# Altium PCB Webbie-V3.3.PcbDoc (part 2 of 3)
Units mil, origin at the board's own origin, x right, y up, seen from the top; angles counter-clockwise.
Board outline 3937.01 x 1574.8 mil, 4 copper layers (Top Layer, GND, GND-POWER, Bottom Layer), stack 61.865 mil thick; 129 components, 99 nets, 520 pads, 260 vias.
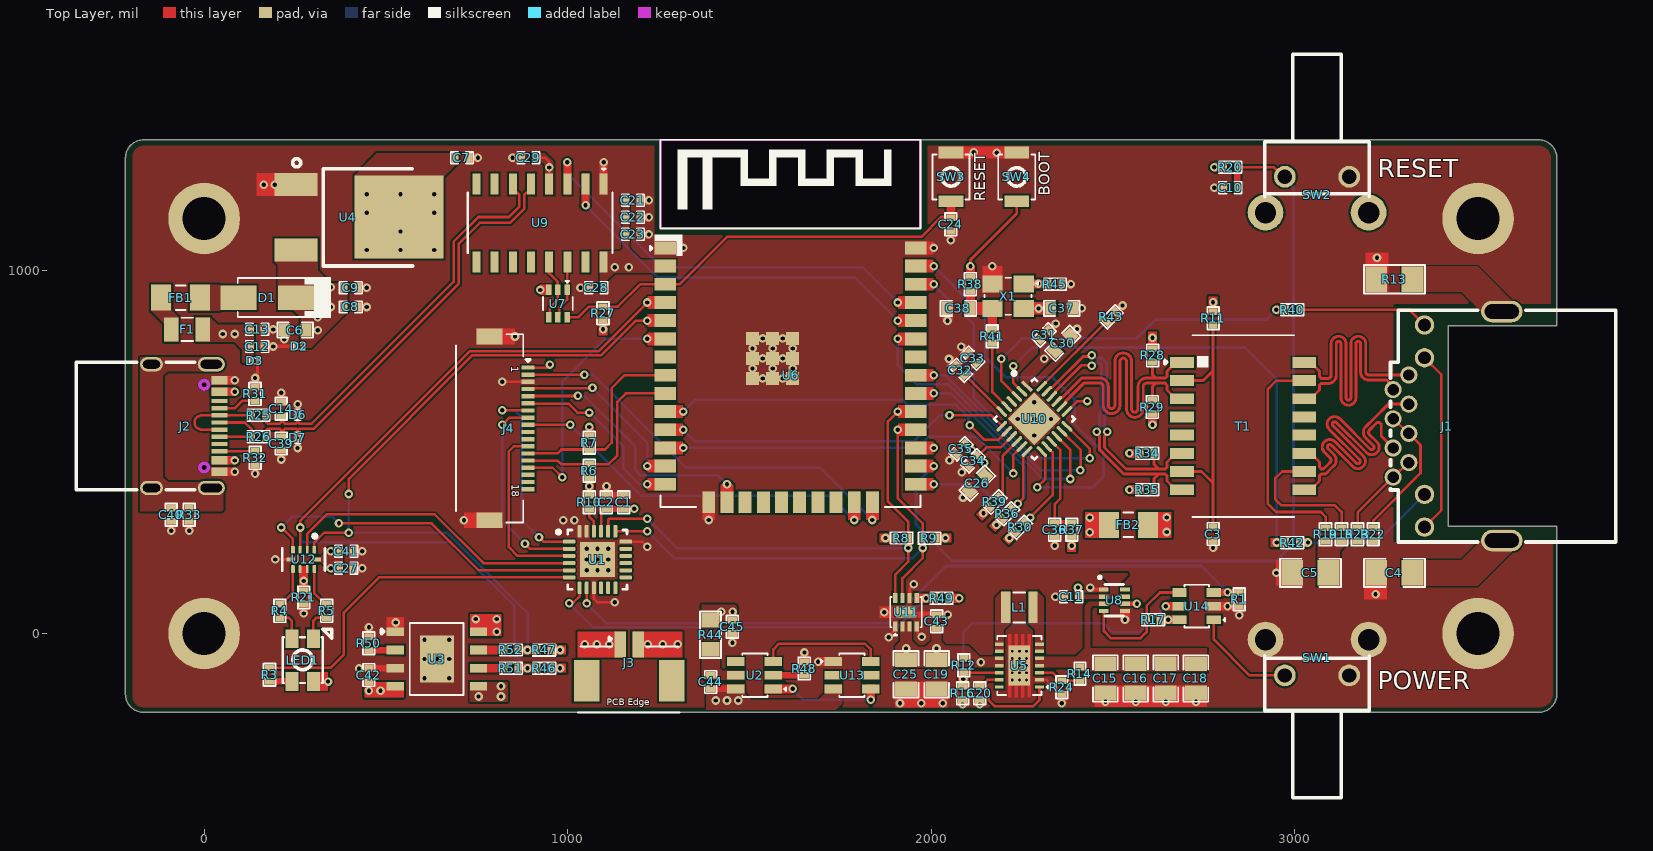
[diagram p0: Top Layer view]

## Part data (continued)
L1: library part DFE252012P-1R0M=P2, "FIXED IND 1UH 3.2A 0.042OHM SMD", Case Code (Imperial)=1008, Case Code (Metric)=2520, Current Rating=4.3A, DC Resistance (DCR)=42mR, Inductance Tolerance=20%, LCSC Part Number=C882955, Manufacturer=Murata, Manufacturer Part Number=DFE252012P-1R0M=P2, Max DC Current=3.2A, Max Operating Temperature=125°C, Min Operating Temperature=-40°C, Test Frequency=1MHz, Case/Package=1008, ComponentLink1Description=http://www.farnell.com/datasheets/2550134.pdf?src-supplier=Farnell, ComponentLink1URL=http://www.farnell.com/datasheets/2550134.pdf?src-supplier=Farnell, ComponentLink2Description=https://www.murata.com/~/media/webrenewal/products/inductor/chip/tokoproducts/wirewoundmetalalloychiptype/m_dfe252012p.ashx?src-supplier=Digikey, ComponentLink2URL=https://www.murata.com/~/media/webrenewal/products/inductor/chip/tokoproducts/wirewoundmetalalloychiptype/m_dfe252012p.ashx?src-supplier=Digikey, ComponentLink3Description=http://www.murata.com/~/media/webrenewal/products/inductor/chip/tokoproducts/wirewoundmetalalloychiptype/m_dfe252012p.ashx?src-supplier=Digikey, ComponentLink3URL=http://www.murata.com/~/media/webrenewal/products/inductor/chip/tokoproducts/wirewoundmetalalloychiptype/m_dfe252012p.ashx?src-supplier=Digikey, ComponentLink4Description=http://www.toko.co.jp/products/pdf/inductors/dfe252012p.pdf?src-supplier=Avnet, ComponentLink4URL=http://www.toko.co.jp/products/pdf/inductors/dfe252012p.pdf?src-supplier=Avnet, Core Material=Ferrite, Depth=2mm, ESR=42mR, Height=1.2mm, Height - Seated (Max)=0.039inch, Item Type=Inductor, Length=0.098inch, Mounting Technology="Surface Mount", Packaging="Cut Tape", Pricing="3000=0.103, 6000=0.1, 9000=0.0987, 12000=0.0976, 15000=0.0942 (USD)", RMS Current (Irms)=3.2A, RoHS=Yes, RoHS Compliant=Yes, Saturation Current=4.3A, Series=DFE252012P, Shielding=Shielded, Stock=30000, Supplier="Future Electronics", Tolerance=20%, Width=0.079inch
LED1: "SMD3528-4P LED Indication - Discrete RoHS", LCSC Part Number=C2827321, Manufacturer=TUOZHAN, Package=SMD3528-4P, ComponentLink1Description="LCSC Link", ComponentLink1URL=https://www.lcsc.com/product-detail/C2827321.html?s_z=n_RGB, Item Type="RGB LED", Manufacturer Part Number=S4-3528RGBTA-A
R1 R6 R7 R8 R9 R10 R20 R21 R27 R30 R37 R39 R45 R46 R47 R49: library part RC0402FR-0710KL, "RES 10K OHM 1% 1/16W 0402", Case Code (Imperial)=0402, Case Code (Metric)=1005, LCSC Part Number=C60490, Manufacturer=Yageo, Max Operating Temperature=155°C, Max Power Dissipation=63mW, Min Operating Temperature=-55°C, Power Rating=62.5mW, Resistance=10kR, Resistance Tolerance=1%, Resistor Type="Thick Film", Supplier Part Number 1=603-RC0402FR-0710KL, Temperature Coefficient=100ppm/°C, Voltage Rating=50V, Case/Package=0402, Category="Chip SMD Resistors", ComponentLink1Description=https://datasheet.ciiva.com/7660/38568-7660787.pdf?src-supplier=Element14, ComponentLink1URL=https://datasheet.ciiva.com/7660/38568-7660787.pdf?src-supplier=Element14, ComponentLink2Description=https://datasheet.ciiva.com/7849/1686128-7849814.pdf?src-supplier=Element14, ComponentLink2URL=https://datasheet.ciiva.com/7849/1686128-7849814.pdf?src-supplier=Element14, ComponentLink3Description=https://datasheet.ciiva.com/7983/1018594-7983486.pdf?src-supplier=Element14, ComponentLink3URL=https://datasheet.ciiva.com/7983/1018594-7983486.pdf?src-supplier=Element14, ComponentLink4Description=https://datasheet.ciiva.com/22747/1018594-22747512.pdf?src-supplier=Element14, ComponentLink4URL=https://datasheet.ciiva.com/22747/1018594-22747512.pdf?src-supplier=Element14, ComponentLink5Description=https://datasheet.ciiva.com/12667/pyu-rc0402-51-rohs-l-6-r-12667067.pdf?src-supplier=Mouser, ComponentLink5URL=https://datasheet.ciiva.com/12667/pyu-rc0402-51-rohs-l-6-r-12667067.pdf?src-supplier=Mouser, ComponentLink6Description=https://datasheet.ciiva.com/7849/1784430-7849813.pdf?src-supplier=Element14, ComponentLink6URL=https://datasheet.ciiva.com/7849/1784430-7849813.pdf?src-supplier=Element14, ComponentLink7Description=https://datasheet.ciiva.com/7849/1784430-7849815.pdf?src-supplier=Element14, ComponentLink7URL=https://datasheet.ciiva.com/7849/1784430-7849815.pdf?src-supplier=Element14, Construction=Rectangular, Depth=0.5mm, Features="Moisture Resistant", Height=0.32mm, Item Type=Resistor, Lead Free="Lead Free", Lead Pitch=0.2mm, Length=1mm, Manufacturer Part Number=RC0402FR-0710KL, Military Standard=Not, Number of Pins=2, Number of Terminations=2, Packaging="Tape and Reel", Pricing 1="1=0.10000, 10=0.01400, 50=0.01400, 100=0.00500, 1000=0.00300, 10000=0.00200 (USD)", REACH SVHC="No SVHC", RoHS=Yes, RoHS Compliant=Yes, Series=RC, Stock 1=18648329, Supplier 1=Mouser, Termination=SMD/SMT, Tolerance=1%, Voltage Rating (DC)=50V, Width=0.5mm, Working Voltage=50V
R3 R4 R5 R15 R19 R22 R23: library part RC0402FR-0775RL, "75Ω ±1% 62.5mW 0402 Thick Film Resistor", LCSC Part Number=C114757, Manufacturer=YAGEO, Package=0402, ComponentLink1Description="LCSC Link", ComponentLink1URL=https://www.lcsc.com/product-detail/C114757.html, Item Type="SMD Resistor", Manufacturer Part Number=RC0402FR-0775RL
R11 R12 R51 R52: library part RC0402FR-070RL, "RES 0 OHM JUMPER 1/16W 0402", Case Code (Imperial)=0402, Case Code (Metric)=1005, LCSC Part Number=C106231, Manufacturer=Yageo, Max Operating Temperature=155°C, Max Power Dissipation=63mW, Min Operating Temperature=-55°C, Power Rating=62.5mW, Resistor Type="Thick Film", Supplier Part Number 1=603-RC0402FR-070RL, Temperature Coefficient=200ppm/°C, Tolerance=1%, Voltage Rating=50V, Case/Package=0402, ComponentLink1Description=https://datasheet.ciiva.com/8896/pyu-rc0402-51-rohs-l-6-8896149.pdf?src-supplier=Avnet, ComponentLink1URL=https://datasheet.ciiva.com/8896/pyu-rc0402-51-rohs-l-6-8896149.pdf?src-supplier=Avnet, ComponentLink2Description=https://datasheet.ciiva.com/16790/pyu-rc0402-51-rohs-l-6-r-16790444.pdf?src-supplier=Future+Electronics, ComponentLink2URL=https://datasheet.ciiva.com/16790/pyu-rc0402-51-rohs-l-6-r-16790444.pdf?src-supplier=Future+Electronics, Contact Plating=Tin,Matte, Features="Moisture Resistant", Height=0.35mm, Item Type=Resistors, Lead Free="Lead Free", Length=1mm, Manufacturer Part Number=RC0402FR-070RL, Mount="Surface Mount", Number of Terminations=2, Packaging="Tape and Reel", Pricing 1="1=0.10000, 10=0.01400, 50=0.01400, 100=0.00600, 1000=0.00300, 5000=0.00200, 10000=0.00100 (USD)", Radiation Hardening=No, Resistance=0R, RoHS=Yes, RoHS Compliant=Yes, Series=RC, Size Code=0402, Stock 1=8556842, Supplier 1=Mouser, Termination=SMD/SMT, Width=0.5mm
R13: library part RC1206FR-071ML, "RES 1M OHM 1% 1/4W 1206", Case Code (Imperial)=1206, Case Code (Metric)=3216, LCSC Part Number=C108083, Manufacturer=Yageo, Max Operating Temperature=155°C, Max Power Dissipation=250mW, Min Operating Temperature=-55°C, Package Quantity=5000, Resistance=1MR, Resistance Tolerance=1%, Resistor Type="Thick Film", Temperature Coefficient=100ppm/°C, Voltage Rating=200V, Case/Package=1206, Category="Chip SMD Resistors", ComponentLink1Description=https://datasheet.ciiva.com/11819/0900766b80c6630a-11819912.pdf?src-supplier=RSComponents, ComponentLink1URL=https://datasheet.ciiva.com/11819/0900766b80c6630a-11819912.pdf?src-supplier=RSComponents, ComponentLink2Description=https://datasheet.ciiva.com/46445/444357-46445709.pdf?src-supplier=Element14, ComponentLink2URL=https://datasheet.ciiva.com/46445/444357-46445709.pdf?src-supplier=Element14, ComponentLink3Description=https://datasheet.ciiva.com/7857/444357-7857289.pdf?src-supplier=Element14, ComponentLink3URL=https://datasheet.ciiva.com/7857/444357-7857289.pdf?src-supplier=Element14, ComponentLink4Description=https://datasheet.ciiva.com/7857/444357-7857288.pdf?src-supplier=Element14, ComponentLink4URL=https://datasheet.ciiva.com/7857/444357-7857288.pdf?src-supplier=Element14, ComponentLink5Description=https://datasheet.ciiva.com/17033/pyu-rc1206-51-rohs-l-4-17033611.pdf?src-supplier=Future+Electronics, ComponentLink5URL=https://datasheet.ciiva.com/17033/pyu-rc1206-51-rohs-l-4-17033611.pdf?src-supplier=Future+Electronics, Construction=Rectangular, Depth=1.6mm, Features="Moisture Resistant", Height=0.55mm, Item Type=Resistor, Lead Free="Lead Free", Length=3.1mm, Manufacturer Part Number=RC1206FR-071ML, Military Standard=Not, Number of Terminations=2, Packaging="Tape and Reel", Power Rating=250mW, Pricing 1="5000=0.00412, 10000=0.00406, 20000=0.00394 (USD)", RoHS=Yes, RoHS Compliant=Yes, Series=RC, Size Code=1206, Stock 1=935000, Supplier 1=Avnet, Supplier Part Number 1=RC1206FR-071ML, Technology="THICK FILM", Termination=SMD/SMT, Tolerance=1%, Width=1.6mm
R14: library part AC0402FR-07768KL, "62.5mW Thick Film Resistor 50V ±100ppm/℃ ±1% 768kΩ 0402 Chip Resistor - Surface Mount ROHS", LCSC Part Number=C227223, Manufacturer=YAGEO, Package=0402, ComponentLink1Description="LCSC Link", ComponentLink1URL=https://lcsc.com/product-detail/Chip-Resistor-Surface-Mount_YAGEO-AC0402FR-07768KL_C227223.html, Item Type=Resistor, Manufacturer Part Number=AC0402FR-07768KL
R16 R17: library part RT0402BRD07100KL, "RES SMD 100K OHM 0.1% 1/16W 0402", LCSC Part Number=C852472, Manufacturer=Yageo, Supplier Part Number=YAG1343CT-ND, Voltage Rating (DC)=50V, Category="Chip SMD Resistors", ComponentLink1Description=https://datasheet.ciiva.com/12724/pyu-rt-1-to-0-05-rohs-l-4-12724954.pdf?src-supplier=Mouser, ComponentLink1URL=https://datasheet.ciiva.com/12724/pyu-rt-1-to-0-05-rohs-l-4-12724954.pdf?src-supplier=Mouser, Item Type=Resistor, Manufacturer Part Number=RT0402BRD07100KL, Pricing="1=0.16, 10=0.121, 50=0.0958, 100=0.0859, 500=0.0654, 1000=0.0578, 5000=0.04283 (USD)", RoHS=Yes, Stock=62932, Supplier=Digikey
R24: library part FRC0402F1373TS, "62.5mW Thick Film Resistor 50V ±100ppm/℃ ±1% 137kΩ 0402 Chip Resistor - Surface Mount ROHS", LCSC Part Number=C5153963, Manufacturer=FOJAN, Package=0402, ComponentLink1Description="LCSC Link", ComponentLink1URL=https://lcsc.com/product-detail/Chip-Resistor-Surface-Mount_FOJAN-FRC0402F1373TS_C5153963.html, Item Type=Resistor, Manufacturer Part Number=FRC0402F1373TS
R25 R26: library part RC0402FR-0727RL, "62.5mW Thick Film Resistors 50V ±100ppm/℃ ±1% 27Ω 0402 Chip Resistor - Surface Mount ROHS", LCSC Part Number=C138021, Manufacturer=YAGEO, Package=0402, ComponentLink1Description="LCSC Link", ComponentLink1URL=https://www.lcsc.com/product-detail/Chip-Resistor-Surface-Mount_YAGEO-RC0402FR-0727RL_C138021.html, Item Type=Resistor, Manufacturer Part Number=RC0402FR-0727RL
R28 R29 R34 R35: library part RC0402FR-0749R9L, "49.9Ω 62.5mW 50V ±100ppm/℃ Thick Film Resistor ±1% 0402 Chip Resistor - Surface Mount ROHS", LCSC Part Number=C87044, Manufacturer=YAGEO, Package=0402, ComponentLink1Description="LCSC Link", ComponentLink1URL=https://www.lcsc.com/product-detail/C87044.html, Item Type=Resistor, Manufacturer Part Number=RC0402FR-0749R9L
R31 R32: library part RC0402FR-075K1L, "RES 5.1K OHM 1% 1/16W 0402", Case Code (Imperial)=0402, Case Code (Metric)=1005, LCSC Part Number=C105872, Manufacturer=Yageo, Max Operating Temperature=155°C, Max Power Dissipation=63mW, Min Operating Temperature=-55°C, Package Quantity=1, Resistance=5.1kR, Resistance Tolerance=1%, Resistor Type="Thick Film", Temperature Coefficient=100ppm/°C, Voltage Rating=50V, Case/Package=0402, Category="Chip SMD Resistors", ComponentLink1Description=https://datasheet.ciiva.com/7983/1018594-7983519.pdf?src-supplier=Element14, ComponentLink1URL=https://datasheet.ciiva.com/7983/1018594-7983519.pdf?src-supplier=Element14, ComponentLink2Description=https://datasheet.ciiva.com/46394/1018594-46394936.pdf?src-supplier=Element14, ComponentLink2URL=https://datasheet.ciiva.com/46394/1018594-46394936.pdf?src-supplier=Element14, ComponentLink3Description=https://datasheet.ciiva.com/2453/pyu-r-int-thick-7-2453401.pdf?src-supplier=Digi-Key, ComponentLink3URL=https://datasheet.ciiva.com/2453/pyu-r-int-thick-7-2453401.pdf?src-supplier=Digi-Key, ComponentLink4Description=https://datasheet.ciiva.com/2453/pyu-r-int-thick-7-2453402.pdf?src-supplier=Digi-Key, ComponentLink4URL=https://datasheet.ciiva.com/2453/pyu-r-int-thick-7-2453402.pdf?src-supplier=Digi-Key, ComponentLink5Description=https://datasheet.ciiva.com/2453/pyu-r-int-thick-7-2453400.pdf?src-supplier=Digi-Key, ComponentLink5URL=https://datasheet.ciiva.com/2453/pyu-r-int-thick-7-2453400.pdf?src-supplier=Digi-Key, ComponentLink6Description=https://datasheet.ciiva.com/12558/pyu-rc0402-51-rohs-l-6-r-8721-12558460.pdf?src-supplier=Mouser, ComponentLink6URL=https://datasheet.ciiva.com/12558/pyu-rc0402-51-rohs-l-6-r-8721-12558460.pdf?src-supplier=Mouser, ComponentLink7Description=https://datasheet.ciiva.com/16744/pyu-rc0402-51-rohs-l-6-r-16744283.pdf?src-supplier=Future+Electronics, ComponentLink7URL=https://datasheet.ciiva.com/16744/pyu-rc0402-51-rohs-l-6-r-16744283.pdf?src-supplier=Future+Electronics, ComponentLink8Description=https://datasheet.ciiva.com/15189/getdatasheetpartid-323636-15189493.pdf?src-supplier=Verical, ComponentLink8URL=https://datasheet.ciiva.com/15189/getdatasheetpartid-323636-15189493.pdf?src-supplier=Verical, Construction=Rectangular, Depth=0.5mm, Features="Moisture Resistant", Height=0.016inch, Item Type=Resistor, Lead Free="Lead Free", Length=1mm, Manufacturer Part Number=RC0402FR-075K1L, Military Standard=Not, Number of Terminations=2, Packaging="Tape and Reel", Power Rating=63mW, Pricing 1="10000=0.00085 (USD)", RoHS=Yes, RoHS Compliant=Yes, Series=RC, Stock 1=65000, Supplier 1=Avnet, Supplier Part Number 1=RC0402FR-075K1L, Technology="THICK FILM", Termination=SMD/SMT, Tolerance=1%, Voltage Rating (DC)=50V, Width=0.02inch, Working Voltage=50V
R33: library part AF0402JR-071ML, "RES SMD 1M OHM 5% 1/16W 0402", Case/Package=0402, LCSC Part Number=C144054, Manufacturer=Yageo, Max Operating Temperature=155°C, Max Power Dissipation=63mW, Min Operating Temperature=-55°C, Resistance=1MR, Resistor Type="Thick Film", Supplier Part Number 1=AF0402JR-071ML-ND, Temperature Coefficient=100ppm/°C, Tolerance=5%, ComponentLink1Description=https://www.yageo.com/upload/media/product/productsearch/datasheet/rchip/PYu-AF_51_RoHS_L_6.pdf?src-supplier=Digi-Key, ComponentLink1URL=https://www.yageo.com/upload/media/product/productsearch/datasheet/rchip/PYu-AF_51_RoHS_L_6.pdf?src-supplier=Digi-Key, Features="Moisture Resistant,Anti-Sulfur", Height=0.015inch, Item Type=Resistor, Length=0.039inch, Manufacturer Part Number=AF0402JR-071ML, Number of Terminations=2, Packaging="Tape and Reel", Pricing 1="10000=0.00408 (USD)", RoHS Compliant=Yes, Stock 1=0, Supplier 1=Digi-Key, Width=0.02inch
R36: library part RC0402FR-071K5L, "RES 1.5K OHM 1% 1/16W 0402", Case Code (Imperial)=0402, Case Code (Metric)=1005, LCSC Part Number=C114759, Manufacturer=Yageo, Max Operating Temperature=155°C, Max Power Dissipation=63mW, Min Operating Temperature=-55°C, Package Quantity=1, Power Rating=62.5mW, Resistance=1.5kR, Resistance Tolerance=1%, Resistor Type="Thick Film", Supplier Part Number 1=311-1.50KLRCT-ND, Temperature Coefficient=100ppm/°C, Voltage Rating=50V, Case/Package=0402, Category="Chip SMD Resistors", ComponentLink1Description=https://datasheet.ciiva.com/11808/0900766b80c66297-11808238.pdf?src-supplier=RSComponents, ComponentLink1URL=https://datasheet.ciiva.com/11808/0900766b80c66297-11808238.pdf?src-supplier=RSComponents, ComponentLink2Description=https://datasheet.ciiva.com/46394/1018594-46394950.pdf?src-supplier=Element14, ComponentLink2URL=https://datasheet.ciiva.com/46394/1018594-46394950.pdf?src-supplier=Element14, ComponentLink3Description=https://datasheet.ciiva.com/2453/pyu-r-int-thick-7-2453440.pdf?src-supplier=Digi-Key, ComponentLink3URL=https://datasheet.ciiva.com/2453/pyu-r-int-thick-7-2453440.pdf?src-supplier=Digi-Key, ComponentLink4Description=https://datasheet.ciiva.com/2453/pyu-r-int-thick-7-2453441.pdf?src-supplier=Digi-Key, ComponentLink4URL=https://datasheet.ciiva.com/2453/pyu-r-int-thick-7-2453441.pdf?src-supplier=Digi-Key, ComponentLink5Description=https://datasheet.ciiva.com/2453/pyu-r-int-thick-7-2453439.pdf?src-supplier=Digi-Key, ComponentLink5URL=https://datasheet.ciiva.com/2453/pyu-r-int-thick-7-2453439.pdf?src-supplier=Digi-Key, ComponentLink6Description=https://datasheet.ciiva.com/12558/pyu-rc0402-51-rohs-l-6-r-8721-12558542.pdf?src-supplier=Mouser, ComponentLink6URL=https://datasheet.ciiva.com/12558/pyu-rc0402-51-rohs-l-6-r-8721-12558542.pdf?src-supplier=Mouser, ComponentLink7Description=https://datasheet.ciiva.com/7849/1018594-7849863.pdf?src-supplier=Element14, ComponentLink7URL=https://datasheet.ciiva.com/7849/1018594-7849863.pdf?src-supplier=Element14, ComponentLink8Description=https://datasheet.ciiva.com/7849/1018594-7849864.pdf?src-supplier=Element14, ComponentLink8URL=https://datasheet.ciiva.com/7849/1018594-7849864.pdf?src-supplier=Element14, ComponentLink9Description=https://datasheet.ciiva.com/15189/getdatasheetpartid-323992-15189370.pdf?src-supplier=Verical, ComponentLink9URL=https://datasheet.ciiva.com/15189/getdatasheetpartid-323992-15189370.pdf?src-supplier=Verical, Construction=Rectangular, Depth=0.5mm, Features="Moisture Resistant", Height=0.016inch, Lead Free="Lead Free", Length=1mm, Manufacturer Part Number=RC0402FR-071K5L, Military Standard=Not, Number of Terminations=2, Packaging="Tape and Reel", Pricing 1="1=0.10000, 10=0.01500, 100=0.00610, 1000=0.00275, 2500=0.00239, 5000=0.00197 (USD)", REACH SVHC="No SVHC", RoHS=Yes, RoHS Compliant=Yes, Series=RC, Size Code=0402, Stock 1=2832947, Supplier 1=Digi-Key, Technology="THICK FILM", Termination=SMD/SMT, Tolerance=1%, Width=0.02inch
R38 R41: library part RC0402FR-0733RL, "RES 33 OHM 1% 1/16W 0402", Case Code (Imperial)=0402, Case Code (Metric)=1005, LCSC Part Number=C138002, Manufacturer=Yageo, Max Operating Temperature=155°C, Max Power Dissipation=63mW, Min Operating Temperature=-55°C, Package Quantity=10000, Power Rating=62.5mW, Resistance Tolerance=1%, Resistor Type="Thick Film", Supplier Part Number 1=603-RC0402FR-0733RL, Temperature Coefficient=100ppm/°C, Voltage Rating=50V, Case/Package=0402, Category="Chip SMD Resistors", ComponentLink1Description=https://datasheet.ciiva.com/11819/0900766b80c66297-11819487.pdf?src-supplier=RSComponents, ComponentLink1URL=https://datasheet.ciiva.com/11819/0900766b80c66297-11819487.pdf?src-supplier=RSComponents, ComponentLink2Description=https://datasheet.ciiva.com/24070/pyu-rc0402-51-rohs-l-6-r-8721-24070077.pdf?src-supplier=Mouser, ComponentLink2URL=https://datasheet.ciiva.com/24070/pyu-rc0402-51-rohs-l-6-r-8721-24070077.pdf?src-supplier=Mouser, ComponentLink3Description=https://datasheet.ciiva.com/7849/1018594-7849967.pdf?src-supplier=Element14, ComponentLink3URL=https://datasheet.ciiva.com/7849/1018594-7849967.pdf?src-supplier=Element14, ComponentLink4Description=https://datasheet.ciiva.com/7849/1018594-7849966.pdf?src-supplier=Element14, ComponentLink4URL=https://datasheet.ciiva.com/7849/1018594-7849966.pdf?src-supplier=Element14, ComponentLink5Description=https://datasheet.ciiva.com/15189/getdatasheetpartid-329253-15189431.pdf?src-supplier=Verical, ComponentLink5URL=https://datasheet.ciiva.com/15189/getdatasheetpartid-329253-15189431.pdf?src-supplier=Verical, ComponentLink6Description=https://datasheet.ciiva.com/17070/pyu-rc0402-51-rohs-l-6-r-17070335.pdf?src-supplier=Future+Electronics, ComponentLink6URL=https://datasheet.ciiva.com/17070/pyu-rc0402-51-rohs-l-6-r-17070335.pdf?src-supplier=Future+Electronics, Construction=Rectangular, Depth=0.5mm, Features="Moisture Resistant", Height=0.35mm, Lead Free="Lead Free", Length=1mm, Manufacturer Part Number=RC0402FR-0733RL, Military Standard=Not, Number of Pins=2, Number of Terminations=2, Packaging="Tape and Reel", Pricing 1="1=0.10000, 10=0.01200, 50=0.01200, 100=0.00500, 1000=0.00300, 10000=0.00100 (USD)", REACH SVHC=Unknown, Resistance=33R, RoHS=Yes, RoHS Compliant=Yes, Series=RC, Size Code=0402, Stock 1=1843488, Supplier 1=Mouser, Technology="THICK FILM", Termination=SMD/SMT, Tolerance=1%, Voltage Rating (DC)=50V, Width=0.5mm
R40 R42: library part RC0402FR-07470RL, "RES 470 OHM 1% 1/16W 0402", Case Code (Imperial)=0402, Case Code (Metric)=1005, LCSC Part Number=C114877, Manufacturer=Yageo, Max Operating Temperature=155°C, Max Power Dissipation=63mW, Min Operating Temperature=-55°C, Package Quantity=1, Power Rating=62.5mW, Resistance Tolerance=1%, Resistor Type="Thick Film", Temperature Coefficient=100ppm/°C, Voltage Rating=50V, Case/Package=0402, ComponentLink1Description=https://datasheet.ciiva.com/46412/1018594-46412838.pdf?src-supplier=Element14, ComponentLink1URL=https://datasheet.ciiva.com/46412/1018594-46412838.pdf?src-supplier=Element14, ComponentLink2Description=https://datasheet.ciiva.com/2453/pyu-r-int-thick-7-2453377.pdf?src-supplier=Digikey, ComponentLink2URL=https://datasheet.ciiva.com/2453/pyu-r-int-thick-7-2453377.pdf?src-supplier=Digikey, ComponentLink3Description=https://datasheet.ciiva.com/2453/pyu-r-int-thick-7-2453378.pdf?src-supplier=Digikey, ComponentLink3URL=https://datasheet.ciiva.com/2453/pyu-r-int-thick-7-2453378.pdf?src-supplier=Digikey, ComponentLink4Description=https://datasheet.ciiva.com/2453/pyu-r-int-thick-7-2453376.pdf?src-supplier=Digikey, ComponentLink4URL=https://datasheet.ciiva.com/2453/pyu-r-int-thick-7-2453376.pdf?src-supplier=Digikey, ComponentLink5Description=https://datasheet.ciiva.com/7850/1018594-7850015.pdf?src-supplier=Element14, ComponentLink5URL=https://datasheet.ciiva.com/7850/1018594-7850015.pdf?src-supplier=Element14, ComponentLink6Description=https://datasheet.ciiva.com/7850/1018594-7850014.pdf?src-supplier=Element14, ComponentLink6URL=https://datasheet.ciiva.com/7850/1018594-7850014.pdf?src-supplier=Element14, ComponentLink7Description=https://datasheet.ciiva.com/15189/getdatasheetpartid-330246-15189463.pdf?src-supplier=Verical, ComponentLink7URL=https://datasheet.ciiva.com/15189/getdatasheetpartid-330246-15189463.pdf?src-supplier=Verical, Construction=Rectangular, Depth=0.5mm, Features="Moisture Resistant", Height=0.016inch, Item Type=Resistor, Lead Free="Lead Free", Length=1mm, Manufacturer Part Number=RC0402FR-07470RL, Military Standard=Not, Number of Terminations=2, Packaging="Tape and Reel", Pricing="10000=0.00085 (USD)", Reach SVHC Compliant=No, RoHS=Yes, RoHS Compliant=Yes, Series=RC, Stock=10000, Supplier=Avnet, Supplier Part Number=RC0402FR-07470RL, Termination=SMD/SMT, Tolerance=1%, Voltage Rating (AC)=50V, Width=0.02inch, Working Voltage=50V
R43: library part RT0402BRD0712K1L, "RES SMD 12.1KOHM 0.1% 1/16W 0402", LCSC Part Number=C281773, Manufacturer=Yageo, Supplier Part Number=2068365, Category="Chip SMD Resistors", ComponentLink1Description=https://datasheet.ciiva.com/12812/pyu-rt-1-to-0-05-rohs-l-4-12812462.pdf?src-supplier=Mouser, ComponentLink1URL=https://datasheet.ciiva.com/12812/pyu-rt-1-to-0-05-rohs-l-4-12812462.pdf?src-supplier=Mouser, Item Type=Resistor, Manufacturer Part Number=RT0402BRD0712K1L, Pricing="10000=0.0245, 20000=0.0217, 30000=0.0237, 50000=0.0233, 100000=0.0228, 200000=0.022 (USD)", RoHS=Yes, Stock=60000, Supplier="Future Electronics"
R44: library part AC0805FR-07100RL, "RES SMD 100 OHM 1% 1/8W 0805", LCSC Part Number=C138274, Manufacturer=Yageo, Supplier Part Number=6087312, Category="Chip SMD Resistors", ComponentLink1Description=https://datasheet.ciiva.com/12656/pyu-ac-51-rohs-l-2-12656967.pdf?src-supplier=Mouser, ComponentLink1URL=https://datasheet.ciiva.com/12656/pyu-ac-51-rohs-l-2-12656967.pdf?src-supplier=Mouser, Item Type=Resistor, Manufacturer Part Number=AC0805FR-07100RL, Pricing="5000=0.0032, 25000=0.003, 125000=0.0028, 375000=0.0027, 1000000=0.0025 (USD)", RoHS=Yes, Stock=70000, Supplier="Future Electronics"
R48: library part CRCW04021K00FKEDHP, "RES SMD 1K OHM 1% 1/5W 0402", Case Code (Imperial)=0402, Case Code (Metric)=1005, LCSC Part Number=C313354, Manufacturer="Vishay Dale", Max Operating Temperature=155°C, Max Power Dissipation=125mW, Min Operating Temperature=-55°C, Package Quantity=10, Resistance=1kR, Resistance Tolerance=1%, Resistor Type="Thick Film", Supplier Part Number 1=541-1.00KYCT-ND, Temperature Coefficient=100ppm/°C, Voltage Rating=50V, Case/Package=0402, ComponentLink1Description=http://www.farnell.com/datasheets/2339608.pdf?src-supplier=Element14, ComponentLink1URL=http://www.farnell.com/datasheets/2339608.pdf?src-supplier=Element14, ComponentLink2Description=http://www.vishay.com/docs/20043/crcwhpe3.pdf?src-supplier=Digi-Key, ComponentLink2URL=http://www.vishay.com/docs/20043/crcwhpe3.pdf?src-supplier=Digi-Key, ComponentLink3Description=http://www.mouser.com/ds/2/427/crcwhpe3-46056.pdf?src-supplier=Mouser, ComponentLink3URL=http://www.mouser.com/ds/2/427/crcwhpe3-46056.pdf?src-supplier=Mouser, ComponentLink4Description=http://www.vishay.com/docs/20043/crcwhpe3.pdf?src-supplier=Avnet, ComponentLink4URL=http://www.vishay.com/docs/20043/crcwhpe3.pdf?src-supplier=Avnet, ComponentLink5Description=http://www.vishay.com/docs/20043/crcwhpe3.pdf?src-supplier=Future+Electronics, ComponentLink5URL=http://www.vishay.com/docs/20043/crcwhpe3.pdf?src-supplier=Future+Electronics, Construction=Rectangular, Contact Plating=Tin, Depth=0.5mm, Features="Automotive AEC-Q200", Height=0.3mm, Lead Free="Lead Free", Length=1mm, Manufacturer Part Number=CRCW04021K00FKEDHP, Military Standard=Not, Mount="Surface Mount", Number of Pins=2, Number of Terminations=2, Packaging="Tape and Reel", Power Rating=125mW, Pricing 1="1=0.15, 10=0.132, 100=0.0506, 1000=0.02226, 2500=0.01923, 5000=0.0172 (USD)", Radiation Hardening=No, REACH SVHC=Unknown, RoHS Compliant=Yes, Series=CRCW-HP, Size Code=0402, Stock 1=315989, Supplier 1=Digi-Key, Technology="THICK FILM", Termination=SMD/SMT, Tolerance=1%, Voltage Rating (DC)=50V, Weight=2.3E-05oz, Width=0.5mm
R50: library part RC0402FR-071K2L, "RES 1.2K OHM 1% 1/16W 0402", Case Code (Imperial)=0402, Case Code (Metric)=1005, LCSC Part Number=C138040, Manufacturer=Yageo, Max Operating Temperature=155°C, Max Power Dissipation=63mW, Min Operating Temperature=-55°C, Package Quantity=1, Resistance=1.2kR, Resistance Tolerance=1%, Resistor Type="Thick Film", Temperature Coefficient=100ppm/°C, Voltage Rating=50V, Case/Package=0402, Category="Chip SMD Resistors", ComponentLink1Description=https://datasheet.ciiva.com/11808/0900766b80c66297-11808455.pdf?src-supplier=RSComponents, ComponentLink1URL=https://datasheet.ciiva.com/11808/0900766b80c66297-11808455.pdf?src-supplier=RSComponents, ComponentLink2Description=https://datasheet.ciiva.com/2453/pyu-r-int-thick-7-2453467.pdf?src-supplier=Digi-Key, ComponentLink2URL=https://datasheet.ciiva.com/2453/pyu-r-int-thick-7-2453467.pdf?src-supplier=Digi-Key, ComponentLink3Description=https://datasheet.ciiva.com/2453/pyu-r-int-thick-7-2453468.pdf?src-supplier=Digi-Key, ComponentLink3URL=https://datasheet.ciiva.com/2453/pyu-r-int-thick-7-2453468.pdf?src-supplier=Digi-Key, ComponentLink4Description=https://datasheet.ciiva.com/2453/pyu-r-int-thick-7-2453466.pdf?src-supplier=Digi-Key, ComponentLink4URL=https://datasheet.ciiva.com/2453/pyu-r-int-thick-7-2453466.pdf?src-supplier=Digi-Key, ComponentLink5Description=https://datasheet.ciiva.com/7849/1018594-7849861.pdf?src-supplier=Element14, ComponentLink5URL=https://datasheet.ciiva.com/7849/1018594-7849861.pdf?src-supplier=Element14, ComponentLink6Description=https://datasheet.ciiva.com/7849/1018594-7849862.pdf?src-supplier=Element14, ComponentLink6URL=https://datasheet.ciiva.com/7849/1018594-7849862.pdf?src-supplier=Element14, ComponentLink7Description=https://datasheet.ciiva.com/15189/getdatasheetpartid-323716-15189366.pdf?src-supplier=Verical, ComponentLink7URL=https://datasheet.ciiva.com/15189/getdatasheetpartid-323716-15189366.pdf?src-supplier=Verical, ComponentLink8Description=https://datasheet.ciiva.com/16745/pyu-rc0402-51-rohs-l-6-r-16745005.pdf?src-supplier=Future+Electronics, ComponentLink8URL=https://datasheet.ciiva.com/16745/pyu-rc0402-51-rohs-l-6-r-16745005.pdf?src-supplier=Future+Electronics, Construction=Rectangular, Depth=0.5mm, Features="Moisture Resistant", Height=0.016inch, Item Type=Resistor, Lead Free="Lead Free", Length=0.039inch, Manufacturer Part Number=RC0402FR-071K2L, Military Standard=Not, Number of Terminations=2, Packaging="Tape and Reel", Power Rating=63mW, Pricing 1="10000=0.00085 (USD)", RoHS=Yes, RoHS Compliant=Yes, Series=RC, Size Code=0402, Stock 1=170000, Supplier 1=Avnet, Supplier Part Number 1=RC0402FR-071K2L, Technology="THICK FILM", Termination=SMD/SMT, Tolerance=1%, Width=0.02inch
SW1 SW2: "Tactile Switch SPST 260gf 9.5mm 6mm x 6mm Through Hole, Right Angle", LCSC Part Number=C2845278, Manufacturer=HCTL, Package="Through Hole,Right Angle-4P,6x6mm", ComponentLink1Description="LCSC Link", ComponentLink1URL=https://www.lcsc.com/product-detail/C2845278.html, Item Type="Tactile Switch", Manufacturer Part Number=TC-6615-9.5-260G
SW3 SW4: "SWITCH TACTILE SPST-NO 0.05A 12V", Contact Current Rating=50mA, Contact Resistance=100mR, Insulation Resistance=100MR, LCSC Part Number=C231329, Manufacturer=Omron, Max Operating Temperature=70°C, Max Voltage Rating (DC)=12V, Min Operating Temperature=-25°C, Operating Force=1.5N, Package Quantity=1, Ratings="Dust Proof,IP40", Supplier Part Number 1=SW1020DKR-ND, Actuator Length=0.4mm, Actuator Type=Standard, ComponentLink1Description=http://www.farnell.com/datasheets/60838.pdf?src-supplier=Farnell, ComponentLink1URL=http://www.farnell.com/datasheets/60838.pdf?src-supplier=Farnell, ComponentLink2Description=http://www.farnell.com/datasheets/60838.pdf?src-supplier=Element14, ComponentLink2URL=http://www.farnell.com/datasheets/60838.pdf?src-supplier=Element14, ComponentLink3Description=https://omronfs.omron.com/en_US/ecb/products/pdf/en-b3u.pdf?src-supplier=Digi-Key, ComponentLink3URL=https://omronfs.omron.com/en_US/ecb/products/pdf/en-b3u.pdf?src-supplier=Digi-Key, ComponentLink4Description=http://www.omron.com/ecb/products/pdf/en-b3u.pdf?src-supplier=Digi-Key, ComponentLink4URL=http://www.omron.com/ecb/products/pdf/en-b3u.pdf?src-supplier=Digi-Key, ComponentLink5Description=https://www.distrelec.biz/Web/Downloads/he/et/B3U_eng_datasheet.pdf?mime=application%2Fpdf&src-supplier=Distrelec, ComponentLink5URL=https://www.distrelec.biz/Web/Downloads/he/et/B3U_eng_datasheet.pdf?mime=application%2Fpdf&src-supplier=Distrelec, ComponentLink6Description=http://www.onlinecomponents.com/productFiles/mf-OM/en-b3u.pdf?src-supplier=Onlinecomponents.com, ComponentLink6URL=http://www.onlinecomponents.com/productFiles/mf-OM/en-b3u.pdf?src-supplier=Onlinecomponents.com, ComponentLink7Description=https://www.verical.com/server-webapp/html/getDatasheet?partID=552554&src-supplier=Verical, ComponentLink7URL=https://www.verical.com/server-webapp/html/getDatasheet?partID=552554&src-supplier=Verical, ComponentLink8Description=http://www.farnell.com/datasheets/1685550.pdf?src-supplier=Element14, ComponentLink8URL=http://www.farnell.com/datasheets/1685550.pdf?src-supplier=Element14, ComponentLink9Description=http://www.farnell.com/datasheets/2610940.pdf?src-supplier=Farnell, ComponentLink9URL=http://www.farnell.com/datasheets/2610940.pdf?src-supplier=Farnell, ComponentLink10Description=https://www.alliedelec.com/m/d/4c8a9ef82804fc3c241a13c1e298fd73.pdf?src-supplier=Allied+Electronics, ComponentLink10URL=https://www.alliedelec.com/m/d/4c8a9ef82804fc3c241a13c1e298fd73.pdf?src-supplier=Allied+Electronics, Contact Material=Silver, Current Rating=50mA, Depth=2.5mm, Electrical Life=200000Cycles, Height=1.2mm, Illumination Type=Non-Illuminated,Illuminated, Item Type=Switch, Lead Free="Lead Free", Length=4mm, Manufacturer Part Number=B3U-1000P, Max Current Rating=50mA, Mechanical Life=200000Cycles, Mount="Surface Mount", Orientation=Straight, Packaging="Tape and Reel", Pricing 1="1=1, 10=0.961, 25=0.9064, 50=0.7976, 100=0.7251, 250=0.68888, 500=0.67074, 1000=0.52571 (USD)", REACH SVHC=Unknown, Stock 1=116454, Supplier 1=Digi-Key, Switch Function=Off-Mom, Switch Travel=0.15mm, Termination=SMD/SMT, Throw Configuration=SPST, Voltage Rating (DC)=12V, Weight=0.000776oz, Width=3mm
T1: "XFRMR MAGNETIC 1PORT 1:1 10/100", Case/Package=Module, DC Resistance (DCR)=650mR, Isolation Voltage=1.5kV, LCSC Part Number=C18584, Manufacturer=Pulse, Max Operating Temperature=70°C, Min Operating Temperature=0°C, Package Quantity=40, Category=Transformers, ComponentLink1Description=https://datasheet.ciiva.com/2938/10-100base-tsingleportsmdmagnetics-rev2008-2938779.pdf?src-supplier=Digikey, ComponentLink1URL=https://datasheet.ciiva.com/2938/10-100base-tsingleportsmdmagnetics-rev2008-2938779.pdf?src-supplier=Digikey, Depth=9.53mm, Height=6.09mm, Height - Seated (Max)=6.22mm, Insertion Loss=-1.1dB, Item Type="RJ45 Transformer", Lead Free="Lead Free", Lead/Base Style="Gull Wing", Length=12.7mm, Manufacturer Part Number=H1102NL, Mounting Technology="Surface Mount", Packaging=Rail/Tube, Pins=16, Pricing="1=3.05066, 10=2.98754, 30=2.92442, 50=2.8613, 100=2.79819, 250=2.73507, 500=2.68247 (USD)", Radiation Hardening=No, Return Loss=-11.5dB, RoHS=Yes, RoHS Compliant=Yes, Series=-, Shielding=Unshielded, Stock=500, Supplier=Avnet, Supplier Part Number=H1102NL, Termination=SMD/SMT, Turns Ratio=1:1, Weight=0.098767oz, Width=7.11mm
U1: "Remote 16-Bit I2C and SMBus I/O Expander with Interrupt Output and Configuration Registers, 1.65 to 5.5 V, -40 to 85 degC, 24-pin QFN (RTW), Green (RoHS & no Sb/Br)", LCSC Part Number=C140277, Manufacturer="Texas Instruments", Package=WQFN-24-EP(4x4), ComponentLink1Description=Datasheet, ComponentLink1URL=http://www.ti.com/general/docs/lit/getliterature.tsp?genericPartNumber=TCA9555&fileType=pdf, ComponentLink3Description="LCSC Link", ComponentLink3URL=https://www.lcsc.com/product-detail/C140277.html?s_z=n_TCA9555, DatasheetVersion=SCPS200A, Eco-Plan="Green (RoHS & no Sb/Br)", I2C Address="0100 xxx", Item Type="IO Expander", Manufacturer Part Number=TCA9555RTWR
U2: "SOT-23-6 Battery Management ROHS", LCSC Part Number=C2909013, Manufacturer="Shenzhen Fuman Elec", Package=SOT-23-6, ComponentLink1Description=LCSC, ComponentLink1URL=https://www.lcsc.com/product-detail/Battery-Management_Shenzhen-Fuman-Elec-DW01-A-J_C2909013.html, Item Type=IC, Manufacturer Part Number=DW01-A/J
U3: "ESOP-8 Battery Management ICs ROHS", LCSC Part Number=C16581, Manufacturer=TOPPOWER, Package=ESOP-8, ComponentLink1Description=LCSC, ComponentLink1URL=https://www.lcsc.com/product-detail/Battery-Management-ICs_TOPPOWER-Nanjing-Extension-Microelectronics-TP4056-42-ESOP8_C16581.html, Item Type=IC, Manufacturer Part Number=TP4056-42-ESOP8
U4: "72dB@(120Hz) Positive Fixed 3.3V TO-252-2(DPAK) Voltage Regulators - Linear, Low Drop Out (LDO) Regulators RoHS", LCSC Part Number=C125622, Manufacturer=UTC, Package=TO-252-2(DPAK), ComponentLink1Description="LCSC Link", ComponentLink1URL=https://www.lcsc.com/product-detail/C125622.html, Item Type="Linear Regulator", Manufacturer Part Number=UZ1085L-33-TN3-R
U5: "IC REG BUCK-BST ADJ 3.5A 14VSON", Case/Package=VSON, LCSC Part Number=C15483, Manufacturer="Texas Instruments", Max Operating Temperature=85°C, Max Output Current=3A, Max Output Voltage=5.5V, Min Input Voltage=1.8V, Min Operating Temperature=-40°C, Min Output Voltage=1.2V, Package Quantity=3000, Quiescent Current=50uA, Supplier Part Number=595-TPS63020DSJR, Switching Frequency=2.4MHz, Category="Voltage Regulators - Switching", ComponentLink1Description=https://datasheet.ciiva.com/29733/tps63021-29733058.pdf?src-supplier=Digi-Key, ComponentLink1URL=https://datasheet.ciiva.com/29733/tps63021-29733058.pdf?src-supplier=Digi-Key, ComponentLink2Description=https://datasheet.ciiva.com/29733/tps63020-29733142.pdf?src-supplier=Digi-Key, ComponentLink2URL=https://datasheet.ciiva.com/29733/tps63020-29733142.pdf?src-supplier=Digi-Key, ComponentLink3Description=https://datasheet.ciiva.com/3221/tps63020-3221509.pdf?src-supplier=Avnet, ComponentLink3URL=https://datasheet.ciiva.com/3221/tps63020-3221509.pdf?src-supplier=Avnet, Efficiency=96%, Item Type=IC, Lead Free="Lead Free", Manufacturer Part Number=TPS63020DSJR, Max Supply Voltage=5.5V, Min Supply Voltage=1.8V, Mounting Technology="Surface Mount", Number of Outputs=1, Operating Supply Voltage=5.5V, Output Configuration=Positive, Output Current=3A, Output Type=Adjustable, Output Voltage=5.5V, Packaging="Tape and Reel", Pins=14, Pricing="1=2.8, 10=2.43, 50=2.43, 100=2.07, 1000=1.46, 10000=1.36 (USD)", Reach SVHC Compliant=No, RoHS=Yes, RoHS Compliant=Yes, Series=-, Stock=18181, Supplier=Mouser, Supply Current=50uA, Synchronous Rectifier=Yes, Topology=Buck-Boost
U6: "RX TXRX MOD WIFI TRACE ANT SMD", LCSC Part Number=C701341, Manufacturer="Espressif Systems", Supplier Part Number 1=1965-ESP32-WROOM-32E(4MB)CT-ND, ComponentLink1Description="LCSC Link", ComponentLink1URL=https://lcsc.com/product-detail/WiFi-Modules_ESPRESSIF-ESP32-WROOM-32E-N4_C701341.html, Manufacturer Part Number=ESP32-WROOM-32E-N4, Pricing 1="1=3.00000 (USD)", RoHS=No, Supplier 1=Digi-Key
U7: "2 NPN pre-biased (Dual) 150mW 100mA 50V SC-70-6(SOT-363) Digital Transistors ROHS", LCSC Part Number=C62892, Manufacturer=Changjiang, ComponentLink1Description=LCSC, ComponentLink1URL=https://www.lcsc.com/product-detail/Digital-Transistors_Jiangsu-Changjing-Electronics-Technology-Co-Ltd-UMH3N_C62892.html, Item Type=Transistor, Manufacturer Part Number=UMH3N
U8: "1.6V to 5V, 2.5A dual ideal diodes with automatic switching function", LCSC Part Number=C3235556, Manufacturer=TI, Package=SOT-583, ComponentLink1Description="LCSC Link", ComponentLink1URL=https://www.lcsc.com/product-detail/C3235556.html, Item Type="ORING IC", Manufacturer Part Number=LM66200DRLR
U9: "2Mbps Transceiver USB 2.0 SOP-16 USB ICs ROHS", LCSC Part Number=C84681, Manufacturer=WCH, Package=SOP-16, ComponentLink1Description=LCSC, ComponentLink1URL=https://www.lcsc.com/product-detail/USB-ICs_WCH-Jiangsu-Qin-Heng-CH340C_C84681.html, Item Type=IC, Manufacturer Part Number=CH340C
U10: "IC TRANSCEIVER FULL 2/2 24SQFN", LCSC Part Number=C45223, Manufacturer=MICROCHIP, Max Operating Temperature=85°C, Min Operating Temperature=0°C, Package=QFN-24-EP(4x4), ComponentLink1Description="LCSC Link", ComponentLink1URL=https://www.lcsc.com/product-detail/C45223.html?s_z=n_LAN8720A, Item Type=RMII, Manufacturer Part Number=LAN8720A-CP-TR, Mount="Surface Mount", Packaging="Tape and Reel", Simplex/Duplex="Full Duplex"
U11: "IC BATT MON LI-ION 1CELL 8TDFN", LCSC Part Number=C2682616, Manufacturer=Maxim, Max Operating Temperature=85°C, Min Operating Temperature=-20°C, Operating Supply Current=23uA, Operating Supply Voltage=4.5V, Output Voltage=400mV, Package Quantity=10000, Supplier Part Number 1=700-MAX17048G+T10, Category="Battery Management", ComponentLink1Description=https://datasheet.ciiva.com/14083/max17048-max17049-14083973.pdf?src-supplier=Digi-Key, ComponentLink1URL=https://datasheet.ciiva.com/14083/max17048-max17049-14083973.pdf?src-supplier=Digi-Key, Contact Plating=Tin,Matte, Item Type=IC, Manufacturer Part Number=MAX17048G+T10, Mount="Surface Mount", Number of Pins=8, Packaging="Tape and Reel", Pricing 1="1=3.34000, 10=3.00000, 50=2.84000, 100=2.46000, 1000=1.89000, 10000=1.83000 (USD)", Radiation Hardening=No, RoHS=Yes, RoHS Compliant=Yes, Series=ModelGauge™, Stock 1=41293, Supplier 1=Mouser
U12: "IC SWITCH DUAL SPDT 10UQFN", Case/Package=QFN, High Level Output Current=300mA, LCSC Part Number=C575568, Manufacturer=TI, Max Operating Temperature=85°C, Max Supply Current=25nA, Max Supply Voltage=3.6V, Min Operating Temperature=-40°C, Min Supply Voltage=1.65V, On-State Resistance=600mR, Operating Supply Current=15nA, Operating Supply Voltage=3V, Package=UQFN-10(1.5x2), Package Quantity=1, Bandwidth=50MHz, ComponentLink1Description="LCSC Link", ComponentLink1URL=https://www.lcsc.com/product-detail/C575568.html, Contact Plating=Gold, Height=0.55mm, Item Type=MUX/DEMUX, Lead Free="Lead Free", Length=2.05mm, Low Level Output Current=300mA, Manufacturer Part Number=TS3A24157RSER, Mount="Surface Mount", Number of Channels=2, Number of Inputs=2, Number of Outputs=4, Number of Pins=10, Packaging="Tape and Reel", Polarity=Non-Inverting, Radiation Hardening=No, REACH SVHC="No SVHC", RoHS Compliant=Yes, Series=-, Supply Type=Single, Throw Configuration=SPDT, Turn-Off Delay Time=25ns, Turn-On Delay Time=35ns, Weight=0.000247oz, Width=1.55mm
U13: "20V 5A 36mΩ@2.5V,3A 830mW 1.2V@250uA 2 N-Channel SOT-23-6 MOSFETs ROHS", LCSC Part Number=C351449, Manufacturer=UMW, Package=SOT-23-6, ComponentLink1Description=LCSC, ComponentLink1URL=https://www.lcsc.com/product-detail/MOSFETs_UMW-Youtai-Semiconductor-Co-Ltd-8205A_C351449.html, Item Type=IC, Manufacturer Part Number=8205A
U14: "IC CNTRLR ON/OFF W/DEB TSOT23-6", Case/Package=SOT-23-6, LCSC Part Number=C79401, Manufacturer=Maxim, Max Operating Temperature=125°C, Max Power Dissipation=727W, Max Supply Voltage=5.5V, Min Operating Temperature=-40°C, Min Supply Voltage=2.7V, Number of Voltages Monitored=1, Operating Supply Current=7uA, Undervoltage Threshold=1.8V, Category="Interface ICs", ComponentLink1Description=https://datasheet.ciiva.com/4901/max16054-83881-4901086.pdf?src-supplier=Mouser, ComponentLink1URL=https://datasheet.ciiva.com/4901/max16054-83881-4901086.pdf?src-supplier=Mouser, ComponentLink2Description=https://datasheet.ciiva.com/1784/max16054-1784560.pdf?src-supplier=Digi-Key, ComponentLink2URL=https://datasheet.ciiva.com/1784/max16054-1784560.pdf?src-supplier=Digi-Key, ComponentLink3Description=https://datasheet.ciiva.com/14247/max16054-14247770.pdf?src-supplier=Avnet, ComponentLink3URL=https://datasheet.ciiva.com/14247/max16054-14247770.pdf?src-supplier=Avnet, ComponentLink4Description=https://datasheet.ciiva.com/1784/max16054-1784561.pdf?src-supplier=Digi-Key, ComponentLink4URL=https://datasheet.ciiva.com/1784/max16054-1784561.pdf?src-supplier=Digi-Key, ComponentLink5Description=https://datasheet.ciiva.com/1784/max16054-1784562.pdf?src-supplier=Digi-Key, ComponentLink5URL=https://datasheet.ciiva.com/1784/max16054-1784562.pdf?src-supplier=Digi-Key, Contact Plating=Tin,Matte, Height=0.73mm, Item Type=IC, Length=4mm, Manufacturer Part Number=MAX16054AZT+T, Mounting Technology="Surface Mount", Output Type=PUSH-PULL, Package Quantity=1, Packaging="Tape and Reel", Pins=6, Pricing 1="1=2.99700 (USD)", Radiation Hardening=No, RoHS=Yes, RoHS Compliant=Yes, Series=-, Stock 1=3, Supplier 1="Arrow Electronics", Supplier Part Number 1=MAX16054AZT+T, Watchdog Timer=No, Width=4mm
X1: library part OT2EL4C4JI-111OLP-50M, "1.8V~3.3V ±10ppm ±20ppm CMOS 50MHz SMD3225-4P Crystal Oscillators ROHS", LCSC Part Number=C5203552, Manufacturer="YXC Crystal Oscillators", Package=SMD3225-4P, ComponentLink1Description="LCSC Link", ComponentLink1URL=https://lcsc.com/product-detail/Crystal-Oscillators_YXC-Crystal-Oscillators-OT2EL4C4JI-111OLP-50M_C5203552.html, Item Type=Crystal, Manufacturer Part Number=OT2EL4C4JI-111OLP-50M

## Free pads (board coordinates)
  round 196.85 hole 118.11 paste+4.8 mask+0.59: G(0,0) G(0,1141.73) G(3503.94,0) G(3503.94,1141.73)

## Via types
v1: diameter 23.62, hole 11.81, Top Layer to Bottom Layer, tented top, 251 vias
v2: diameter 19.68, hole 11.81, Top Layer to Bottom Layer, 9 vias

## Nets (pads, with @x,y where several pads share a name; then routed paths per layer and width w, separated by ;. In a path a pad name is that pad's centre, name@x,y a point inside that pad or via, vN(x,y) a via of type N, cw(c..) or ccw(c..) an arc to the next point about the centre after c; other vN are vias at no path point)
3.3V_ESP: C1.1 C2.1 C11.2 C21.2 C22.2 C23.2 C26.2 C27.2 C28.1 C29.1 C34.1 C35.1 C37.2 C41.2 FB2.2 J4.1 LED1.2 R6.2 R7.2 R8.2 R9.2 R10.2 R20.2 R21.1 R27.2 R30.2 R36.2 R37.2 R39.2 R46.2 R47.2 R49.2 U1.21 U6.2 U8.2 U8.7 U9.4 U9.16 U10.9 U12.7 U12.8 U12.10 X1.4 | length 461.9
  Top Layer w7: J4.1@891.03,731.87 942.87,731.87 v1(951,740) ; C29.1@910.5,1309 938,1309 949,1298 U9.4@949,1237.26 ; U1.21@1091.63,281.51 1091.63,331.7 1103.03,343.1 C2.1@1106.53,343.1 ; C35.1@2094.55,521.54 C34.1@2127.81,488.31 ; C26.2@2147.92,434.88 2146.15,436.64 v1(2146.15,469.97) C34.1@2127.81,488.31 2151.59,512.1 2191.1,512.1 U10.9@2221.51,542.51
  other v1: 340.8,-131.84 978.84,-95.04 978.84,-45.05 2077.22,97.28 2403.63,126.65 274,145 348.45,179.81 348.45,226.82 2386.21,241.54 1874.08,263 2038.91,263 2214.92,262.89 2647.87,279.49 2179.37,298.98 2647.87,319.65 2143.45,330.8 1183.06,343.09 1059.52,405.51 2111.18,504.93 1059.52,568.49 1097.14,837.05 2295.15,894.34 1129.17,1007.94 1168.36,1007.94 949,1282.25 2778.65,1283
+3V3_BATT: C15.2 C16.2 C17.2 C18.2 R14.2 U5.4 U5.5 U8.3
+3V3_USB: C7.2 U4.2 U8.6 | length 2660.2
  GND-POWER w15: v1(540.26,1055) 540.26,959.64 626.9,873 962.66,873 1266.82,568.84 1266.82,268.45 1352.27,183 2464.81,183 v1(2565.69,82.12)
  other v1: 447.53,1055 633,1055 540.26,1106.16 447.53,1157.33 633,1157.33 447.53,1208.49 540.26,1208.49 633,1208.49
+5V_OUT: C6.2 C8.2 C9.1 C42.1 D1.1 D2.2 U3.4 U3.8 U4.3
  other v1: 453.21,-157.44 485,-157.44 805,4.96 747,40 805,40 312.05,834.8 312.05,869.99 348.49,898.46 348.49,952.49
ALRT: R49.1 U1.7 U11.5 | length 1102.1
  Top Layer w7: v1(1004.03,83.13) 1007.21,86.31 1016.34,86.31 1032.57,102.54 U1.7@1032.57,126
  Bottom Layer w7: v1(1004.03,83.13) 1070.13,17.03 1905.25,17.03 v1(1985.5,97.28)
AVDD: C30.2 C31.1 FB2.1 J1.10 J1.12 R11.2 R28.2 R29.2 R34.2 R35.2 U10.1 U10.19 | length 571.7
  Top Layer w7: U10.19@2373.26,610.75 2402.14,639.63 v1(2429.18,639.63) ; J1.12@3356.78,292.92 3402.69,338.83 3402.69,712.75 J1.10@3356.77,758.66
  other v1: 2436,279.03 2436,319.19 2545,395.87 2545,495.87 2608.34,574.62 2310.58,755.92 2608.54,814.06 2775,911.06
B-: C44.2 J3.2 U2.6 U13.3
  other v1: 1407,-183.91 1438.04,-183.91 1469.08,-183.91 1220.17,-29.62 1261.58,-29.62 1302.99,-29.62
BUCK_EN: R12.2 R16.2 U5.12 U14.5 | length 831.1
  Top Layer w7: R12.2@2091.91,-107.51 U5.12@2187.37,-107.51
  Bottom Layer w7: v1(2088.11,-124.74) 2088.11,3.9 2112.9,28.69 2474.12,28.69 2498.66,4.16 2573.54,4.16 v1(2645.03,75.64)
CH: R5.2 U12.9 | length 112.4
  Top Layer w7: U12.9@303.27,177.43 303.27,110.9 333.21,80.96 R5.2@336.71,80.96
CHG_LED: U1.4 U12.2 | length 842.3
  Top Layer w7: U12.2@283.59,230.57 283.59,274.88 336.71,328 634.27,328 768.36,193.91 U1.4@1004.03,193.91
CHRG: R47.1 R52.1 U6.5 U12.1 | length 1960.5
  Top Layer w7: U12.1@303.27,230.57 303.27,250.76 330.27,277.76 v1(397.88,277.76) ; v1(397.88,384) 397.88,425.87 737.24,765.23 1091.62,765.23 1187.21,860.83 v1(1219.1,860.83)
  Bottom Layer w7: v1(397.88,384) v1(397.88,277.76) 668.21,277.76 889.42,56.55 889.42,-44.41 v1@888.79,-45.04
  other v1: 889.42,-45.04
CLEAR: R1.1 U1.8 U14.3 | length 1923.3
  Top Layer w7: v1(1052,83) 1052.13,83.13 1052.13,125.87 U1.8@1052.26,126
  Bottom Layer w7: v1(1052,83) 1105.97,29.03 1883.01,29.03 2039.98,186 2743,186 v1(2815,114)
CLK50M: C38.2 R38.1 R41.1 X1.3
DTR: U7.2 U7.4 U9.13 | length 172.9
  Top Layer w7: U7.4@947.41,870.6 950.89,874.08 950.89,896.92 973,919.03 U7.2@973,945.4 972.91,945.49 972.91,967.3 948.37,991.85 U9.13@948.37,1022.72
EN: C24.1 R27.1 SW3.2 U6.3 U7.6 | length 1170.6
  Top Layer w7: U7.6@998.59,870.6 1029.58,870.6 1058.45,899.47 R27.1@1097.14,899.47 1137.55,899.47 1198.91,960.83 U6.3@1268.31,960.83 1307.83,960.83 1438.5,1091.5 1972.73,1091.5 2027.23,1146 2050.72,1146 2051.33,1146.61 C24.1@2053.83,1144.11
ETH2X_LED1: J1.9 R40.2 | length 362.6
  Top Layer w7: R40.2@3011.5,890.64 3314.95,890.64 J1.9@3356.78,848.82
ETH2X_LED2: J1.11 R42.2 | length 375.6
  Bottom Layer w7: v1(3036.04,250.55) 3224.26,250.55 J1.11@3356.78,383.07
FL: R4.2 U12.6 | length 113.5
  Top Layer w7: R4.2@208.14,80.96 211.64,80.96 244.22,113.54 U12.6@244.22,177.43
FULL_LED: U1.5 U12.4 | length 939.4
  Top Layer w7: v1(212.21,292) 244.22,259.99 U12.4@244.22,230.57 ; v1(370.58,303.41) 625.59,303.41 754.77,174.23 U1.5@1004.03,174.23
  Bottom Layer w7: v1(212.21,292) 241.29,321.08 352.91,321.08 v1(370.58,303.41)